# Altium PCB inwall_wifi.PcbDoc
Units mm, origin at the board's own origin, x right, y up, seen from the top; angles counter-clockwise.
Board outline 50 x 50 mm, 2 copper layers (Top Layer, Bottom Layer); 35 components, 23 nets, 342 pads, 21 vias.
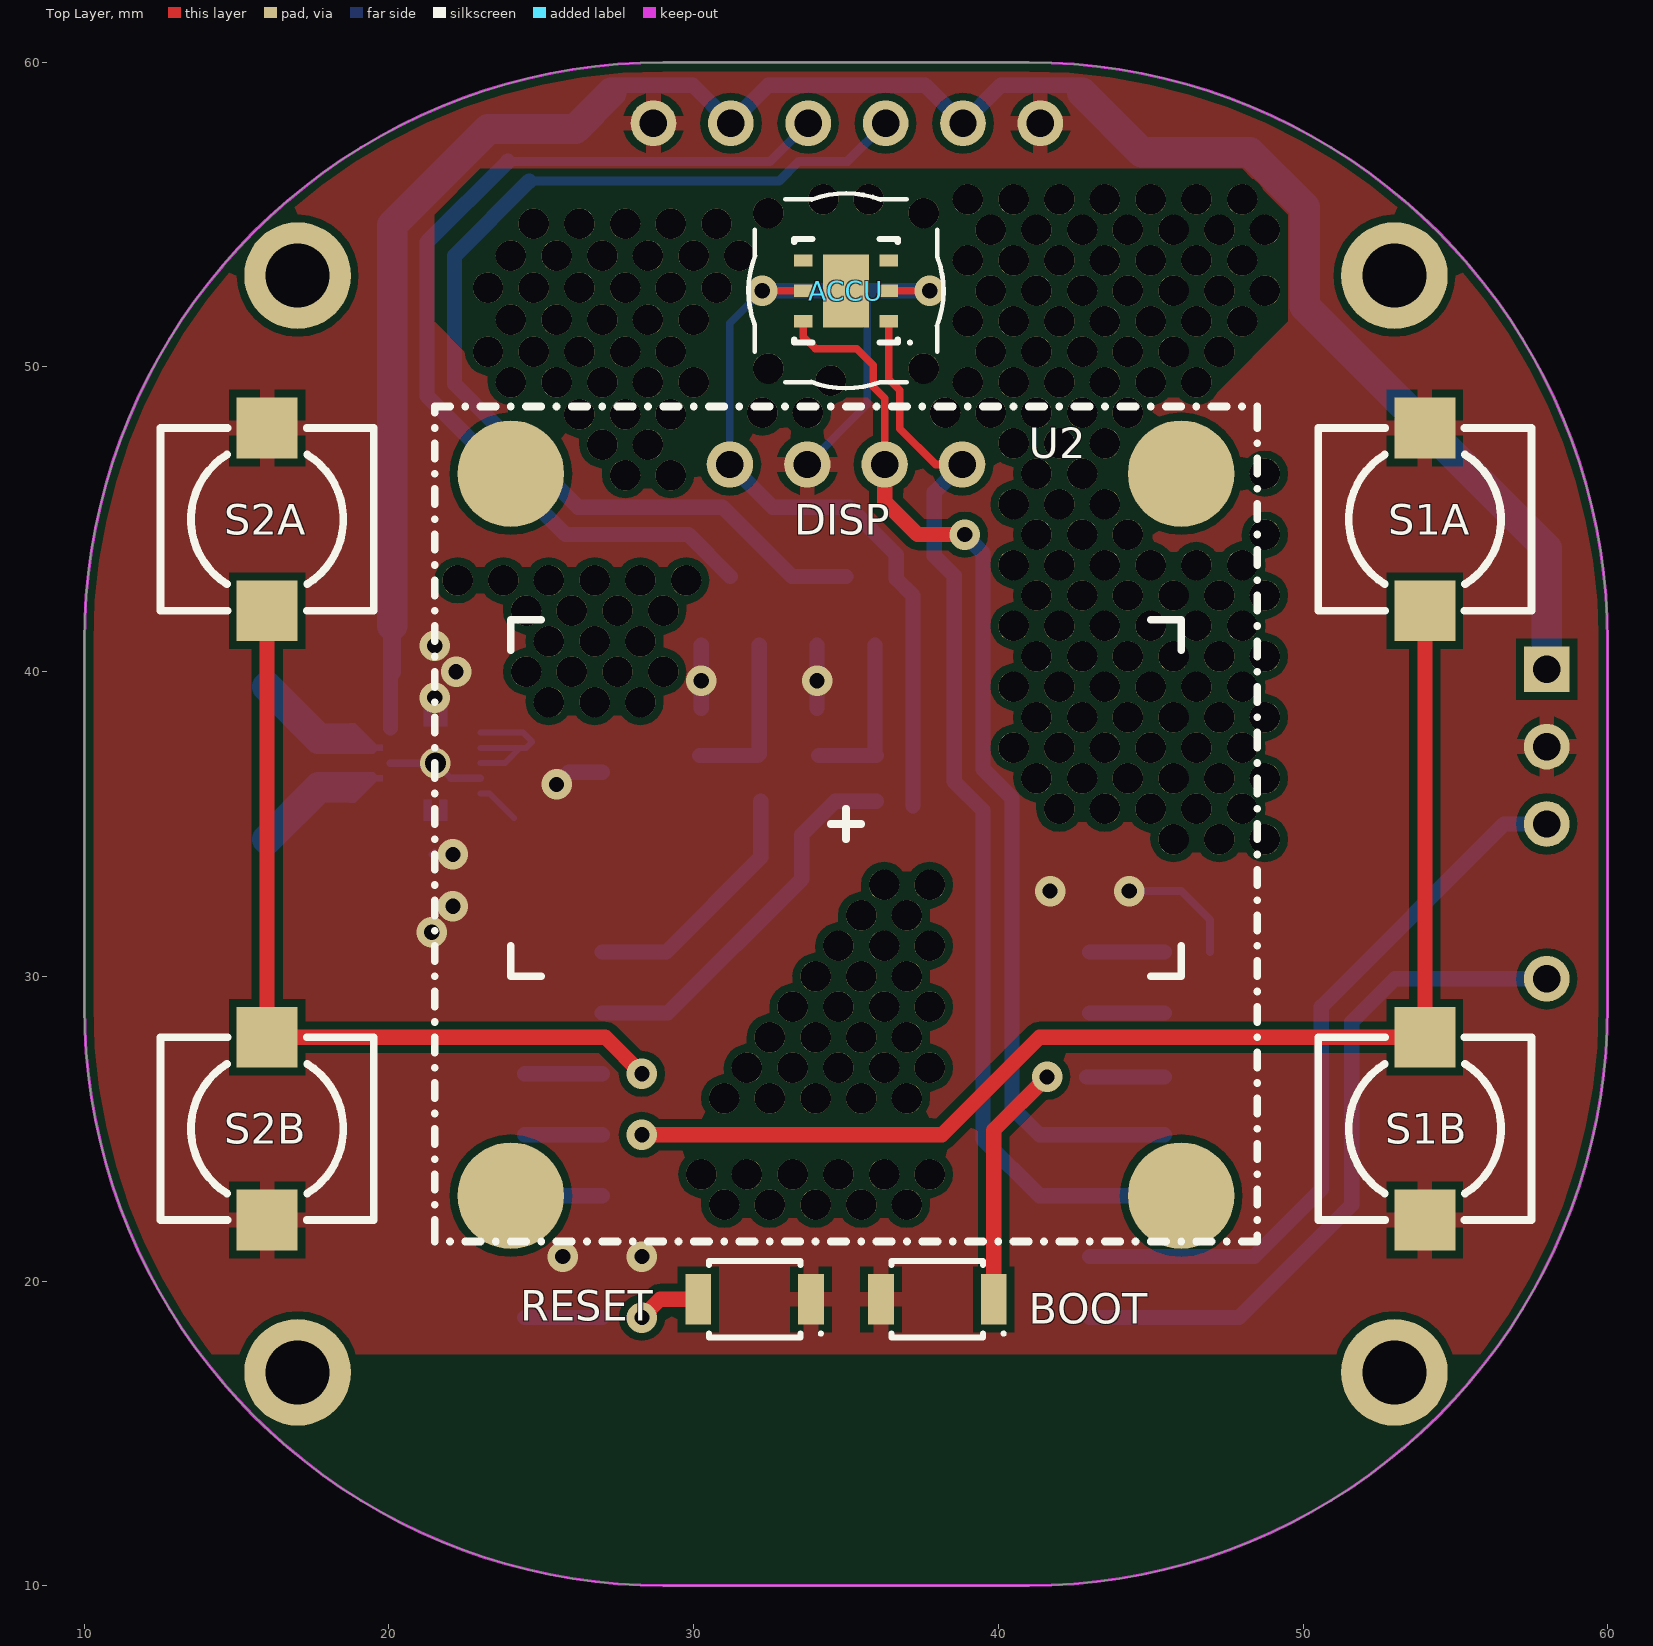
[diagram p0: Top Layer view]
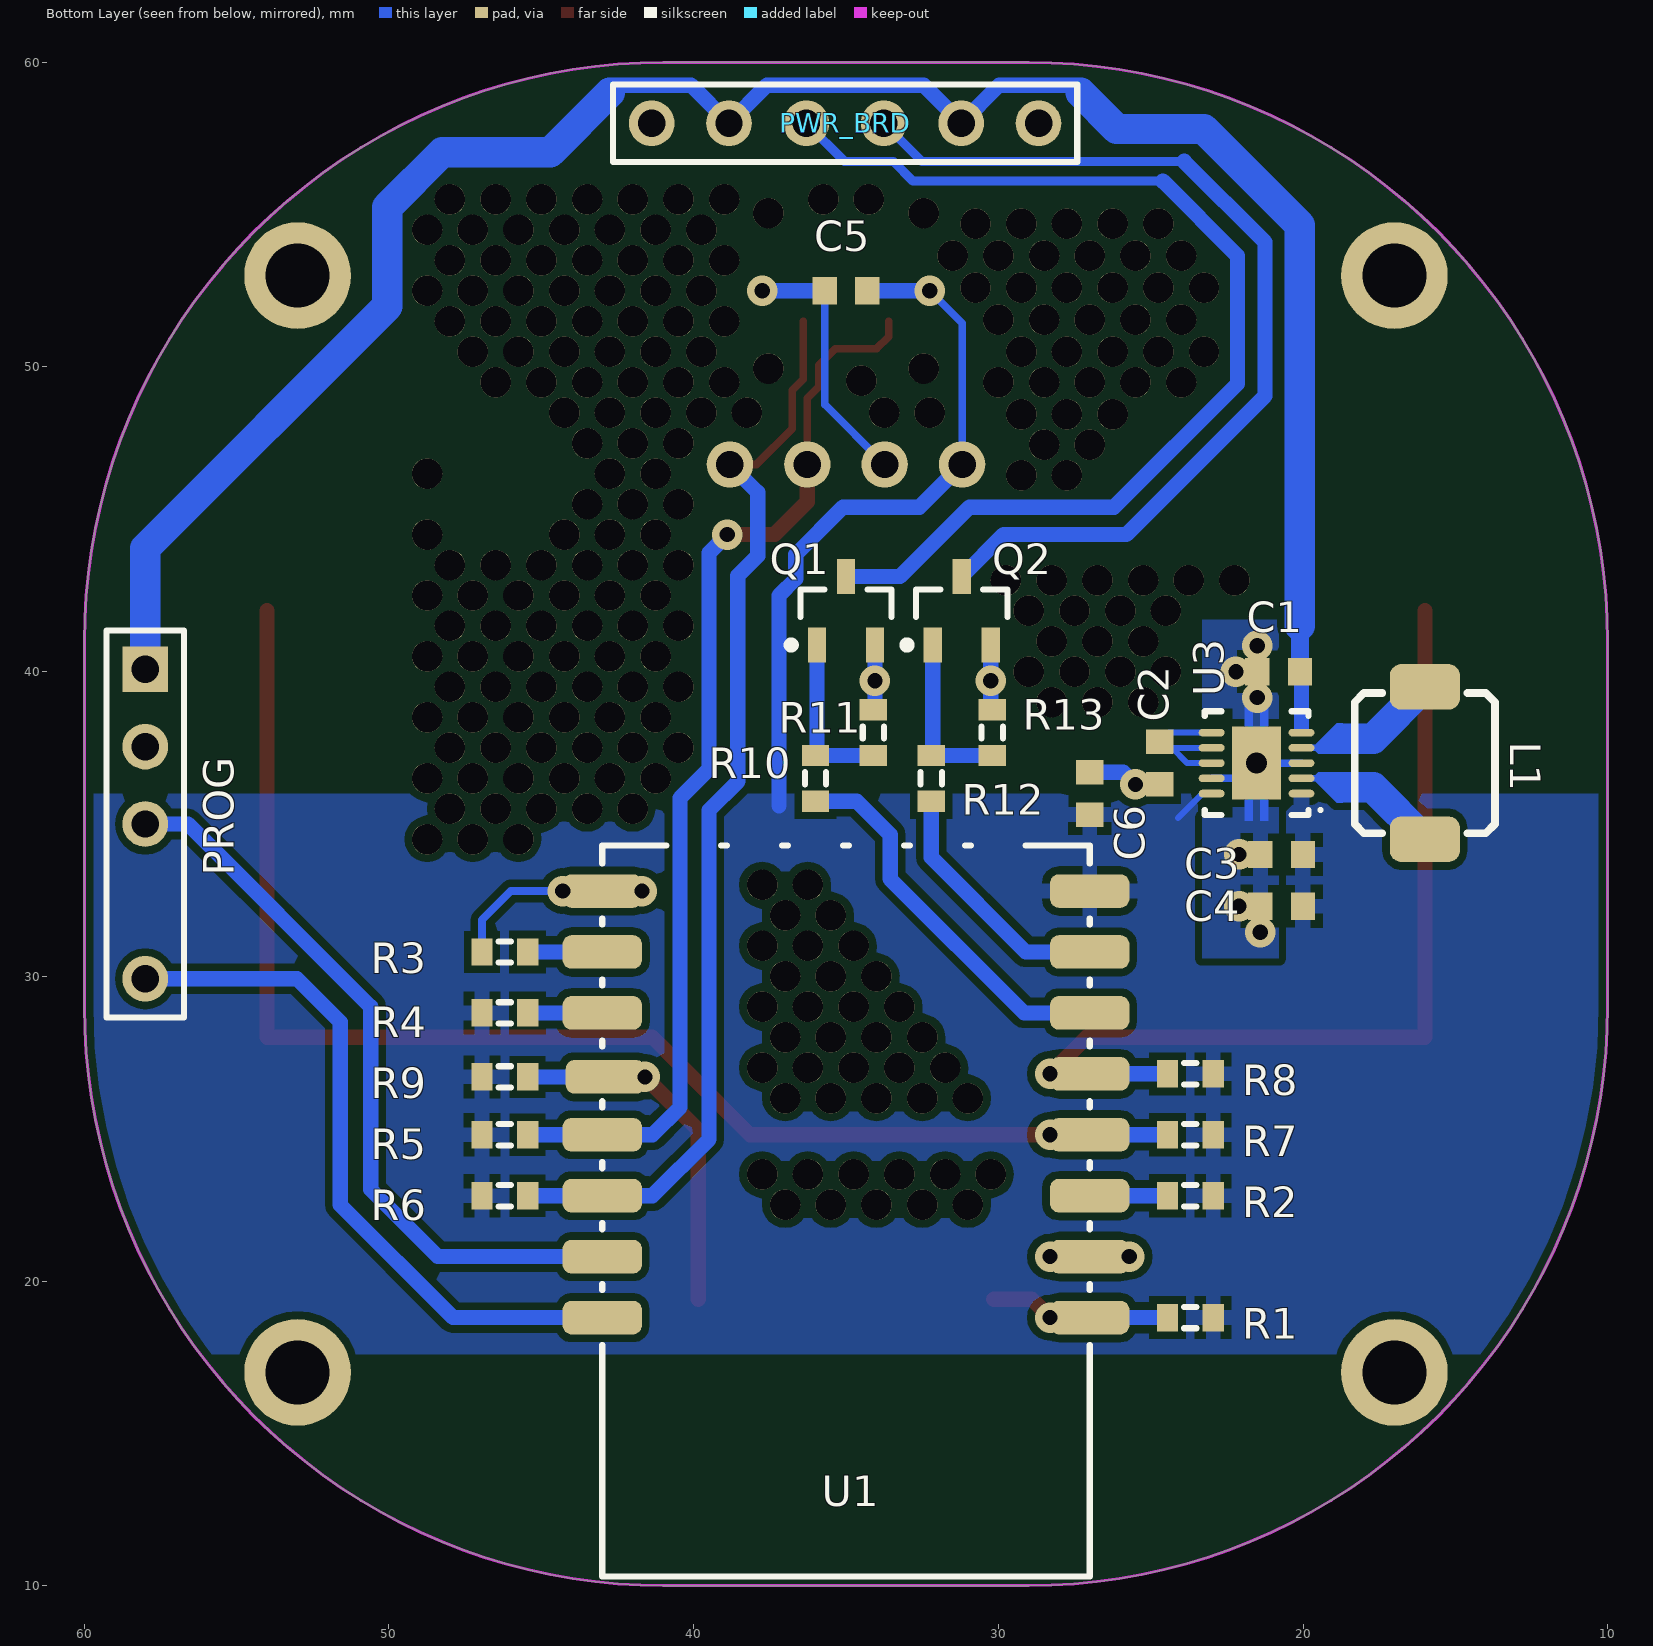
[diagram p1: Bottom Layer view, seen from below]

## Layer stack, top to bottom
Top Solder: solder mask 0.0102, Solder Resist, Dk 3.5
Top Layer: signal copper 0.0356
Dielectric 1: dielectric 0.32, FR-4, Dk 4.8
Bottom Layer: signal copper 0.0356
Bottom Solder: solder mask 0.0102, Solder Resist, Dk 3.5

## Board outline
29,10 cw(c29,29) 10,29 10,41 cw(c29,41) 29,60 41,60 cw(c41,41) 60,41 60,29 cw(c41,29) 41,10

## Design rules (kind name [scope] priority, off if disabled: settings)
Clearance [All] p1: gap=0.25 ignorepadtopadclearanceinfootprint=FALSE except(0: Arc-Hole Track-Hole SMDPad-Hole THPad-Hole Via-Hole Fill-Hole Poly-Hole Region-Hole Text-Hole)
ComponentClearance [All] p1: gap=0.1 collisioncheckmode=3 verticalgap=0.254 showdistances=FALSE
DiffPairsRouting [All] p1: maxlimit=0.5 minlimit=0.125 mostfreqgap=0.25 toplayer_minwidth=0.125 toplayer_maxwidth=1 toplayer_prefwidth=0.25 bottomlayer_minwidth=0.125 bottomlayer_maxwidth=1 bottomlayer_prefwidth=0.25 maxuncoupledlength=12.7
FanoutControl Fanout_BGA [IsBGA] p1: bgadir=Out bgaviamode=Centered fanoutstyle=BGA fanoutdirection=None viagrid=0.025 // Fanout_BGA (Default Rule)
HoleSize [All] p1: absolutevalues=TRUE maxlimit=5 minlimit=0.33 maxpercent=80.000 minpercent=20.000
HoleToHoleClearance [All] p1: gap=0.25 allowstackedmicrovias=TRUE
MatchedLengths [InNetClass('SPIFI')] p1: tolerance=0.2 checknetsindiffpair=TRUE checkdiffpairvsdiffpair=FALSE checkxsignals=FALSE checkothers=FALSE
MinimumAnnularRing [All] p1: minimumring=0.178
MinimumSolderMaskSliver [All] p1: minsoldermaskwidth=0.05
PlaneClearance [All] p1: clearance=0.152
PlaneConnect [All] p1: planeconnectstyle=Direct reliefexpansion=0.508 reliefentries=4 reliefconductorwidth=0.254 reliefairgap=0.254
PolygonConnect [All] p1: thpad.connectstyle=Relief thpad.reliefconductorwidth=0.5 thpad.reliefentries=4 thpad.polygonreliefangle="90 Angle" thpad.airgapwidth=0.25 smdpad.connectstyle=Relief smdpad.reliefconductorwidth=0.5 smdpad.reliefentries=4 smdpad.polygonreliefangle="90 Angle" smdpad.airgapwidth=0.25 via.connectstyle=Direct via.reliefconductorwidth=0.4 via.reliefentries=4 via.polygonreliefangle="90 Angle" via.airgapwidth=0.25
RoomDefinition inwall_wifi [InComponentClass('inwall_wifi')] p1: confinementstyle=ConfineIn formatcopy=TRUE lockcomponents=FALSE outline 61,61 9,61 9,9 61,9
RoutingCorners [All] p1: cornerstyle=45-Degree minsetback=1 maxsetback=1
RoutingVias [All] p1: holewidth=0.35 width=0.7 viastyle="Through Hole" minholewidth=0.33 minwidth=0.686 maxholewidth=0.8 maxwidth=2
SilkToSilkClearance [All] p1: silktosilkclearance=0
SilkToSolderMaskClearance SilkscreenOverComponentPads [IsPad] p1: minsilkscreentomaskgap=0 clearancetoexposedcopper=TRUE
SolderMaskExpansion [All] p1: expansion=0.01
Width [All] p1: maxlimit=5 minlimit=0.152 preferedwidth=0.2
19 further rules are at their usual default settings.

## Components (designator, comment, footprint, x,y, rotation, side; value= is the part's Value field where it differs from the comment)
ACCU "" SF2 35,52.5 r0 top
BOOT "SW-PB" B3U-1000P(M) 38,19.4 r180 top
C1 "Cap Semi" 1608[0603] 20.8,40 r0 bottom value=10uF
C2 "Cap Semi" 1608[0603] 24.7,37 r270 bottom value=100nF
C3 "Cap Semi" 1608[0603] 20.7,34 r180 bottom value=10uF
C4 "Cap Semi" 1608[0603] 20.7,32.3 r180 bottom value=10uF
C5 "Cap Semi" 1608[0603] 35,52.5 r0 bottom value=100nF
C6 "Cap Semi" 1608[0603] 27,36 r90 bottom value=100nF
DISP "0.96'' OLED I2C" OLED_I2C 35,35 r0 top
L1 "HPI0420-2R2" "HPI 0420" 16,37 r270 bottom value=2.2uH
PROG "Header 5" HDR1X5 58,40.08 r270 bottom
PWR_BRD "Header 6" HDR1X6 28.68,58 r0 bottom
Q1 "BC817-25" SOT-23A_N 35,42 r90 bottom
Q2 "BC817-25" SOT-23A_N 31.2,42 r90 bottom
R1 "Res3" J1-0603 23.7,18.8 r180 bottom value=10k
R2 "Res3" J1-0603 23.7,22.8 r180 bottom value=10k
R3 "Res3" J1-0603 46.2,30.8 r180 bottom value=10k
R4 "Res3" J1-0603 46.2,28.8 r0 bottom value=10k
R5 "Res3" J1-0603 46.2,24.8 r0 bottom value=10k
R6 "Res3" J1-0603 46.2,22.8 r0 bottom value=10k
R7 "Res3" J1-0603 23.7,24.8 r180 bottom value=10k
R8 "Res3" J1-0603 23.7,26.8 r180 bottom value=10k
R9 "Res3" J1-0603 46.2,26.7 r0 bottom value=10k
R10 "Res3" J1-0603 36,36.5 r90 bottom value=330
R11 "Res3" J1-0603 34.1,38 r270 bottom value=10k
R12 "Res3" J1-0603 32.2,36.5 r270 bottom value=330
R13 "Res3" J1-0603 30.2,38 r90 bottom value=10k
RESET "SW-PB" B3U-1000P(M) 32,19.4 r180 top
S1A "SW-PB" B3AL 54,45 r90 top
S1B "SW-PB" B3AL 54,25 r270 top
S2A "SW-PB" B3AL 16,45 r90 top
S2B "SW-PB" B3AL 16,25 r270 top
U1 "ESP12E" ESP12E 27,18.8 r0 bottom
U2 "SHT21" SON100P300X120_HS-7N 35,52.5 r180 top
U3 "TPS63031DRCR" DRC10-2400X1650TP 21.525,37 r0 bottom

## Footprints (in the part's own frame and the unit in brackets; to place one, negate y for a bottom-side part, rotate by r counter-clockwise, add the part's x,y. Pads: shape width x height; smd on the part's side, far side on the other; paste and mask are expansions set on the pad)
1608[0603] [mm] "Chip Capacitor, Body 1.6x0.8mm, IPC High Density"
  rect 0.8x0.9 smd: 1(-0.7,0) 2(0.7,0)
  body extent -0.87,-0.48 0.87,0.48, height 1.3
B3AL [mm] "B3AL button"
  rect 2x2 smd: 1(-3,0) 2(3,0)
  silkscreen extent -3,-3.5 3,3.5, body extent -3.13,-3.13 3.13,3.13, height 5
B3U-1000P(M) [mm] "SMD microswitch"
  rect 0.85x1.65 smd: 1(-1.85,0) 2(1.85,0)
  silkscreen extent -2.22,-1.25 1.5,1.25, body extent -1.5,-1.25 1.5,1.25, height 1.75
DRC10-2400X1650TP [mm] "SON, 10-Leads, Body 3x3mm, Pitch 0.5mm, Thermal Pad 2.4x1.65mm, TI Recommended"
  oval 0.85x0.25 smd paste-0.025 mask+0.07: 1(-1.475,1) 2(-1.475,0.5) 3(-1.475,0) 4(-1.475,-0.5) 5(-1.475,-1) 6(1.475,-1) 7(1.475,-0.5) 8(1.475,0) 9(1.475,0.5) 10(1.475,1)
  rect 1.6x2.4 smd paste-0.825 mask+0.07: 11(0,0)
  Top Layer region: -0.39,1.9 -0.11,1.9 -0.11,1.2 -0.39,1.2
  Top Layer region: 0.39,1.2 0.11,1.2 0.11,1.9 0.39,1.9
  Top Layer region: 0.39,-1.9 0.11,-1.9 0.11,-1.2 0.39,-1.2
  Top Layer region: -0.39,-1.2 -0.11,-1.2 -0.11,-1.9 -0.39,-1.9
  silkscreen extent -2.15,-1.7 1.7,1.7, body extent -1.55,-1.55 1.55,1.55, height 1
ESP12E [mm] "ESP12E"
  rrect50% 2.6x1.1 smd: 1(0,0) 2(0,-2) 3(0,-4) 4(0,-6) 5(0,-8) 6(0,-10) 7(0,-12) 8(0,-14) 15(16,-14) 16(16,-12) 17(16,-10) 18(15.9,-7.9) 19(16,-6) 20(16,-4) 21(16,-2) 22(16,0)
  silkscreen extent 0,-15.5 16,8.5, body extent -0.13,-15.63 16.13,8.63, height 3.5
HDR1X5 [mm] "Connector; Header; 5 Position"
  rect 1.5x1.5 hole 0.9: 1(0,0)
  round 1.5 hole 0.9: 2(2.54,0) 3(5.08,0) 5(10.16,0)
  silkscreen extent -1.27,-1.27 11.43,1.27
HDR1X6 [mm] "Connector; Header; 6 Position"
  round 1.5 hole 0.9: 1(0,0) 2(2.54,0) 3(5.08,0) 4(7.62,0) 5(10.16,0) 6(12.7,0)
  silkscreen extent -1.27,-1.27 13.97,1.27
"HPI 0420" [mm] "SMD mounted power inductor"
  rrect50% 1.5x2.3 smd: 1(-2.5,0) 2(2.5,0)
  silkscreen extent -2.3,-2.3 2.3,2.3, body extent -2.43,-2.43 2.43,2.43, height 2
J1-0603 [mm] "Chip Resistor, Body 1.6x0.8mm, IPC High Density"
  rect 0.7x0.9 smd: 1(-0.75,0) 2(0.75,0)
  silkscreen extent -0.2,-0.35 0.2,0.35, body extent -0.85,-0.48 0.85,0.48, height 0.9
OLED_I2C [mm] "0.96'' OLED I2C"
  round 1.524 hole 0.9: 1(-3.81,11.8) 2(-1.27,11.8) 3(1.27,11.8) 4(3.81,11.8)
  round 3.5 smd: MH(-11,-12.2) MH(-11,11.5) MH(11,-12.2) MH(11,11.5)
  silkscreen extent -13.5,-13.7 13.5,13.7, body extent -13.5,-13.7 13.5,13.7, height 2.55
SF2 [mm] "SHT21 filter cap"
  round 1 hole 1 unplated: MH(-2.55,-2.55) MH(-2.55,2.55) MH(2.55,-2.55) MH(2.55,2.55)
  silkscreen extent -3.2,-3.2 3.2,3.2, body extent -3.2,-3.2 3.2,3.2, height 1.9
SON100P300X120_HS-7N [mm] "SON, 6-Leads, Body 3,00x3,00mm, Pitch 1,00mm, Thermal Pad 2,40x1,50mm, IPC Medium Density"
  rect 0.6x0.4 smd: 1(-1.4,1) 2(-1.4,0) 3(-1.4,-1) 4(1.4,-1) 5(1.4,0) 6(1.4,1)
  rect 1.5x2.4 smd: 7(0,0)
  silkscreen extent -2.15,-1.7 1.7,1.75, body extent -1.55,-1.55 1.55,1.55, height 1.2
SOT-23A_N [mm] "SOT23, 3-Leads, Body 2.9x1.3mm, Pitch 0.95mm, Lead Span 2.3mm, IPC Medium Density"
  rect 1.15x0.6 smd: 1(-1.125,0.95) 2(-1.125,-0.95) 3(1.125,0)
  silkscreen extent -1.25,-1.5 0.7,1.93, body extent -0.7,-1.5 0.7,1.5, height 1.09

## Part data
BOOT RESET: "Switch", Supplier Part Number 1=2500851, LatestRevisionDate=17-Jul-2002, LatestRevisionNote="Re-released for DXP Platform.", PackageDescription="Switch; 2 Leads", PackageReference=SPST-2, Published=24-Mar-1999, Publisher="Altium Limited", Supplier 1=Farnell, Supplier 2=Farnell, Supplier Part Number 2=1333652
C1 C2 C3 C4 C5 C6: "Capacitor (Semiconductor SIM Model)", LatestRevisionDate=29-May-2009, LatestRevisionNote="IPC-7351 Footprint Added.", PackageDescription="Chip Capacitor", PackageReference=C1206, Published=8-Jun-2000, Publisher="Altium Limited"
DISP: library part OLED_I2C, Supplier Part Number 1=REX012864MXPP3N0, Supplier 1=TME
L1: library part "Inductor Iron", "Magnetic-Core Inductor", LatestRevisionDate=17-Jul-2002, LatestRevisionNote="Re-released for DXP Platform.", PackageDescription="Axial Device, Thru-Hole; 2 Leads; 0.9 in Pin Spacing", PackageReference=AXIAL-0.9, Published=24-Mar-1999, Publisher="Altium Limited", Supplier 1=TME, Supplier Part Number 1=HPI0420-2R2
PROG: "Header, 5-Pin", LatestRevisionDate=17-Jul-2002, LatestRevisionNote="Re-released for DXP Platform.", Publisher="Altium Limited"
PWR_BRD: "Header, 6-Pin", LatestRevisionDate=17-Jul-2002, LatestRevisionNote="Re-released for DXP Platform.", Publisher="Altium Limited"
Q1 Q2: "NPN General Purpose Amplifier", ComponentLink1Description="Manufacturer Link", ComponentLink1URL=http://www.fairchildsemi.com/, ComponentLink2Description="Discontinuation Notice", ComponentLink2URL=http://www.fairchildsemi.com/obsolete/obs.jsp, DatasheetVersion=1997, LatestRevisionDate=20-Nov-2009, LatestRevisionNote="IPC-7351 Footprint Added.", PackageDescription="3-Pin SOT-23 Package 0.95 mm Pitch, 2.3 mm Lead Span", PackageReference=SOT-23A, PackageVersion=Sep-1998, Published=8-Jun-2000, Publisher="Altium Limited"
R1 R2 R3 R4 R5 R6 R7 R8 R9 R10 R11 R12 R13: "Resistor", LatestRevisionDate=29-May-2009, LatestRevisionNote="IPC-7351 Footprint Added.", PackageDescription="Chip Resistor", PackageReference=J1-0603, Published=8-Jun-2000, Publisher="Altium Limited"
S1A S1B S2A S2B: "Switch", Supplier Part Number 1=1908276RL, LatestRevisionDate=17-Jul-2002, LatestRevisionNote="Re-released for DXP Platform.", PackageDescription="Switch; 2 Leads", PackageReference=SPST-2, Published=24-Mar-1999, Publisher="Altium Limited", Supplier 1=Farnell, Supplier 2=Farnell, Supplier 3=Farnell, Supplier 4=Farnell, Supplier Part Number 2=1908275, Supplier Part Number 3=1908272, Supplier Part Number 4=1908274
U2: "SHT21 H/T sensor"
U3: library part TPS63001DRCR, "Buck-Boost Voltage Converter with 1.8 to 5.5 V Input and 3.3 V Output, -40 to 85 degC, 10-Pin SON (DRC), Green (RoHS & no Sb/Br)", Dynamic Voltage Scaling=TRUE, Manufacturer="Texas Instruments", Supplier Part Number 1=296-19643-2-ND, Switching Frequency(Max)(kHz)=1500, ComponentLink1Description=Datasheet, ComponentLink1URL=http://www.ti.com/general/docs/lit/getliterature.tsp?genericPartNumber=TPS63001&fileType=pdf, ComponentLink2Description="Package Specification", ComponentLink2URL=http://www.ti.com/litv/pdf/mpds117k, DatasheetVersion=SLVS520B, Eco-Plan="Green (RoHS & no Sb/Br)", Iout(Max)(A)=1.2, Iq(Typ)(mA)=0.03, Mounting Technology="Surface Mount", PackageDescription="10-Pin Plastic Small Outline No-Lead, 3 x 3 x 1 mm Body, 0.5 mm Pitch, Exposed Pad", PackageReference=DRC10-2400X1650TP, PackageVersion="revL, Sep-2011", PartNumber=TPS63001DRCR, Preset Vout(V)=3.3, Regulated Outputs(#)=1, SubFamily="Buck-Boost Regulator", Supplier 1=Digi-Key, Supplier 2=Digi-Key, Supplier 3=Digi-Key, Supplier 4=Farnell, Supplier 5=Newark, Supplier 6=Mouser, Supplier 7=TME, Supplier Part Number 2=296-19643-1-ND, Supplier Part Number 3=296-19643-6-ND, Supplier Part Number 4=1412595, Supplier Part Number 5=85K1711, Supplier Part Number 6=595-TPS63001DRCR, Supplier Part Number 7=TPS63031DSKT, Synchronous Rectification=TRUE, Topology=Buck-Boost, Vin(Max)(V)=5.5, Vin(Min)(V)=1.8, Vout(Max)(V)=3.3, Vout(Min)(V)=3.3

## Free pads (board coordinates)
  round 3.5 hole 2.1 unplated: MH(17,17) MH(17,53) MH(53,17) MH(53,53)
  round 1 hole 1 unplated: TH(22.25,43) TH(23.25,50.5) TH(23.25,52.6) TH(23.75,43) TH(24,51.55) TH(24,53.65) TH(24,49.5) TH(24.5,40) TH(24.5,42) TH(24.75,50.5) TH(24.75,52.6) TH(24.75,54.7) TH(25.25,39) TH(25.25,41) TH(25.25,43) TH(25.5,51.55) TH(25.5,53.65) TH(25.5,49.5) TH(26,40) TH(26,42) TH(26.25,50.5) TH(26.25,52.6) TH(26.25,54.7) TH(26.25,48.45) TH(26.75,41) TH(26.75,39) TH(26.75,43) TH(27,51.55) TH(27,53.65) TH(27,49.5) TH(27,47.45) TH(27.5,40) TH(27.5,42) TH(27.75,50.5) TH(27.75,52.6) TH(27.75,54.7) TH(27.75,48.45) TH(27.75,46.45) TH(28.25,41) TH(28.25,39) TH(28.25,43) TH(28.5,51.55) TH(28.5,53.65) TH(28.5,49.5) TH(28.5,47.45) TH(29,40) TH(29,42) TH(29.25,50.5) TH(29.25,52.6) TH(29.25,54.7) TH(29.25,48.45) TH(29.25,46.45) TH(29.75,43) TH(30,51.55) TH(30,53.65) TH(30,49.5) TH(30.25,23.5) TH(30.75,52.6) TH(30.75,54.7) TH(31,22.5) TH(31,26) TH(31.5,53.65) TH(31.75,23.5) TH(31.75,27) TH(32.25,48.5) TH(32.5,22.5) TH(32.5,26) TH(32.5,28) TH(33.25,23.5) TH(33.25,27) TH(33.25,29) TH(33.75,48.5) TH(34,22.5) TH(34,26) TH(34,28) TH(34,30) TH(34.25,55.5) TH(34.5,49.55) TH(34.75,23.5) TH(34.75,27) TH(34.75,29) TH(34.75,31) TH(35.5,22.5) TH(35.5,26) TH(35.5,28) TH(35.5,30) TH(35.5,32) TH(35.75,55.5) TH(36.25,23.5) TH(36.25,27) TH(36.25,29) TH(36.25,33) TH(36.25,31) TH(37,22.5) TH(37,26) TH(37,28) TH(37,30) TH(37,32) TH(37.75,23.5) TH(37.75,27) TH(37.75,29) TH(37.75,31) TH(37.75,33) TH(38.25,48.5) TH(39,53.5) TH(39,51.5) TH(39,49.5) TH(39,55.5) TH(39.75,54.5) TH(39.75,52.5) TH(39.75,50.5) TH(39.75,48.5) TH(40.5,53.5) TH(40.5,51.5) TH(40.5,49.5) TH(40.5,47.5) TH(40.5,45.5) TH(40.5,43.5) TH(40.5,41.5) TH(40.5,37.5) TH(40.5,39.5) TH(40.5,55.5) TH(41.25,54.5) TH(41.25,52.5) TH(41.25,50.5) TH(41.25,48.5) TH(41.25,46.5) TH(41.25,44.5) TH(41.25,42.5) TH(41.25,36.5) TH(41.25,38.5) TH(41.25,40.5) TH(42,55.5) TH(42,53.5) TH(42,51.5) TH(42,49.5) TH(42,47.5) TH(42,45.5) TH(42,43.5) TH(42,35.5) TH(42,41.5) TH(42,37.5) TH(42,39.5) TH(42.75,54.5) TH(42.75,52.5) TH(42.75,50.5) TH(42.75,48.5) TH(42.75,46.5) TH(42.75,44.5) TH(42.75,42.5) TH(42.75,36.5) TH(42.75,38.5) TH(42.75,40.5) TH(43.5,55.5) TH(43.5,53.5) TH(43.5,51.5) TH(43.5,49.5) TH(43.5,47.5) TH(43.5,45.5) TH(43.5,43.5) TH(43.5,35.5) TH(43.5,41.5) TH(43.5,37.5) TH(43.5,39.5) TH(44.25,54.5) TH(44.25,52.5) TH(44.25,50.5) TH(44.25,48.5) TH(44.25,44.5) TH(44.25,42.5) TH(44.25,36.5) TH(44.25,38.5) TH(44.25,40.5) TH(45,55.5) TH(45,51.5) TH(45,53.5) TH(45,49.5) TH(45,43.5) TH(45,35.5) TH(45,41.5) TH(45,37.5) TH(45,39.5) TH(45.75,54.5) TH(45.75,52.5) TH(45.75,50.5) TH(45.75,34.5) TH(45.75,42.5) TH(45.75,36.5) TH(45.75,38.5) TH(45.75,40.5) TH(46.5,55.5) TH(46.5,53.5) TH(46.5,51.5) TH(46.5,49.5) TH(46.5,35.5) TH(46.5,43.5) TH(46.5,41.5) TH(46.5,37.5) TH(46.5,39.5) TH(47.25,54.5) TH(47.25,52.5) TH(47.25,50.5) TH(47.25,34.5) TH(47.25,42.5) TH(47.25,36.5) TH(47.25,38.5) TH(47.25,40.5) TH(48,55.5) TH(48,53.5) TH(48,51.5) TH(48,43.5) TH(48,35.5) TH(48,41.5) TH(48,37.5) TH(48,39.5) TH(48.75,54.5) TH(48.75,52.5) TH(48.75,46.5) TH(48.75,34.5) TH(48.75,44.5) TH(48.75,42.5) TH(48.75,36.5) TH(48.75,38.5) TH(48.75,40.5)

## Via types
v1: diameter 1, hole 0.5, Top Layer to Bottom Layer, tented both sides, 18 vias
v2: diameter 1, hole 0.5, Top Layer to Bottom Layer, 2 vias
v3: diameter 1, hole 0.7, Top Layer to Bottom Layer, 1 vias

## Nets (pads, with @x,y where several pads share a name; then routed paths per layer and width w, separated by ;. In a path a pad name is that pad's centre, name@x,y a point inside that pad or via, vN(x,y) a via of type N, cw(c..) or ccw(c..) an arc to the next point about the centre after c; other vN are vias at no path point)
BUTTON1: R7.1 S1A.1 S1B.1 U1.4 | length 43.6
  Top Layer w0.5: v1(28.3,24.8) 38.15,24.8 41.35,28 S1B.1 S1A.1
  Bottom Layer w0.5: R7.1 U1.4
BUTTON2: R8.1 S2A.1 S2B.1 U1.5 | length 29.3
  Top Layer w0.5: S2A.1 S2B.1 27.1,28 v1(28.3,26.8)
  Bottom Layer w0.5: R8.1 U1.5
FLASH: BOOT.1 R9.1 U1.18 | length 10.6
  Top Layer w0.5: BOOT.1 39.85,24.95 v1(41.6,26.7)
  Bottom Layer w0.5: U1.18 R9.1
GND: BOOT.2 C1.2 C2.2 C3.1 C4.1 C5.2 C6.2 DISP.2 PROG.2 PWR_BRD.1 PWR_BRD.6 Q1.2 Q2.2 R3.1 R11.1 R13.2 RESET.1 S1A.2 S1B.2 S2A.2 S2B.2 U1.2 U1.15 U2.2 U3.3 U3.9 U3.11 | length 23.3
  Top Layer w0.25: U2.2 v2(37.75,52.5)
  Bottom Layer w0.2: C3.1 C3.1@21.5,34.1 ; v3(21.525,37) U3.11@22.025,36.5 ; R13.2 R13.2@30.25,38.8 ; R11.1@34.05,38.8 R11.1
  Bottom Layer w0.25: U3.3 v3(21.525,37) ; U3.11@22.025,36.5 U3.9 ; DISP.2 35.7,48.77 C5.2
  Bottom Layer w0.254: v1(44.3,32.8) 46,32.8 46.95,31.85 R3.1
  Bottom Layer w0.5: v1(25.5,36.3) 25.9,36.7 C6.2 ; R13.2@30.25,38.8 v1(30.25,39.7) Q2.2 ; R11.1@34.05,38.8 v1(34.05,39.7) Q1.2 ; C5.2 v2(37.75,52.5)
  other v1: 25.7,20.8 28.3,20.8 21.4,31.45 22.1,32.3 41.7,32.8 22.1,34 21.5,39.15 22.2,40 21.5,40.85
LOAD1: R10.1 U1.6 | length 12.7
  Bottom Layer w0.5: U1.6 29.15,28.8 33.55,33.2 33.55,34.65 34.65,35.75 R10.1
LOAD2: R12.2 U1.7 | length 8.3
  Bottom Layer w0.5: U1.7 29.1,30.8 32.2,33.9 R12.2
NetC2_1: C2.1 U3.6 U3.7 U3.8 | length 5.1
  Bottom Layer w0.2: U3.8 23.8,37 C2.1@24.3,37.5 ; U3.7 C2.1@24.3,37.5 ; U3.6 24.4,38 C2.1 24.5,37.5 C2.1@24.3,37.5
NetL1_1: L1.1 U3.4 | length 3.4
  Bottom Layer w1: L1.1 17.7,37.8 18.7,37.8
NetL1_2: L1.2 U3.2 | length 3.4
  Bottom Layer w1: L1.2 17.7,36.2 18.7,36.2
NetQ1_1: Q1.1 R10.2 R11.2 | length 5.5
  Bottom Layer w0.2: R10.2@35.95,37.3 R10.2
  Bottom Layer w0.5: R11.2 R10.2 ; R10.2@35.95,37.3 Q1.1
NetQ2_1: Q2.1 R12.1 R13.1 | length 5.5
  Bottom Layer w0.2: R12.1@32.1,37.25 R12.1@32.15,37.3
  Bottom Layer w0.5: R13.1 R12.1@32.1,37.25 ; R12.1@32.15,37.3 Q2.1
NetR1_1: R1.1 RESET.2 U1.1 | length 4.6
  Top Layer w0.5: v1(28.3,18.8) 28.9,19.4 RESET.2
  Bottom Layer w0.5: R1.1 U1.1
NetR2_1: R2.1 U1.3 | length 2.5
  Bottom Layer w0.5: R2.1 U1.3
NetR3_2: R3.2 U1.16 | length 2.4
  Bottom Layer w0.5: U1.16 R3.2
NetR4_1: R4.1 U1.17 | length 2.5
  Bottom Layer w0.5: U1.17 R4.1
OC1: PWR_BRD.4 Q1.3 | length 35.6
  Bottom Layer w0.3: 24.6,56.1 32.8,56.1 33.45,56.75 35.05,56.75 PWR_BRD.4
  Bottom Layer w0.5: 24.6,56.1 22.15,53.65 22.15,49.45 26.2,45.4 30.95,45.4 33.225,43.125 Q1.3
OC2: PWR_BRD.3 Q2.3 | length 31.6
  Bottom Layer w0.3: 23.9,56.75 32.51,56.75 PWR_BRD.3
  Bottom Layer w0.5: 23.9,56.75 21.25,54.1 21.25,49.05 25.8,44.5 29.825,44.5 Q2.3
RX: PROG.3 U1.21 | length 24.4
  Bottom Layer w0.5: U1.21 48.4,20.8 50.6,23 50.6,29 56.6,35 PROG.3
SCL: DISP.3 R5.1 U1.19 U2.6 | length 35.9
  Top Layer w0.25: U2.6 33.6,51 34,50.6 35.35,50.6 35.9,50.05 35.9,49.35 36.27,48.98 DISP.3@36.27,46.94
  Top Layer w0.5: DISP.3 36.27,45.58 37.35,44.5 v1(38.9,44.5)
  Bottom Layer w0.25: DISP.3 36.27,46.87 36.34,46.87 DISP.3@36.27,46.94
  Bottom Layer w0.5: v1(38.9,44.5) 39.5,43.9 39.5,36.8 40.45,35.85 40.45,25.7 41.35,24.8 U1.19 ; U1.19@42.9,24.8 R5.1
SDA: DISP.4 R6.1 U1.20 U2.1 | length 36.2
  Top Layer w0.25: U2.1 36.4,49.6 36.77,49.23 36.77,47.98 37.95,46.8 DISP.4
  Bottom Layer w0.5: DISP.4 37.9,45.89 37.9,43.8 38.55,43.15 38.55,36.4 39.5,35.45 39.5,24.65 41.35,22.8 U1.20 ; U1.20@42.9,22.8 R6.1
TX: PROG.5 U1.22 | length 23.1
  Bottom Layer w0.5: U1.22 47.9,18.8 51.6,22.5 51.6,28.5 53.02,29.92 PROG.5
VCC_3.3V: C3.2 C4.2 C5.1 C6.1 DISP.1 R1.2 R2.2 R4.2 R5.2 R6.2 R7.2 R8.2 R9.2 U1.8 U2.5 U3.1 U3.10 | length 26.1
  Top Layer w0.25: v2(32.25,52.5) U2.5
  Bottom Layer w0.2: U3.10 23.3,36 24.1,35.2
  Bottom Layer w0.25: DISP.1 31.19,51.44 v2(32.25,52.5)
  Bottom Layer w0.5: DISP.1 32.59,45.4 35.1,45.4 36.65,43.85 36.65,43.05 37.2,42.5 37.2,35.6 ; v2(32.25,52.5) C5.1
VCC_5.0V: C1.1 PROG.1 PWR_BRD.2 PWR_BRD.5 U3.5 | length 70.4
  Bottom Layer w0.2: C1.1@20.05,39.95 C1.1
  Bottom Layer w0.5: 20.05,38.15 C1.1@20.05,39.95 ; 27.3,59.25 29.97,59.25 PWR_BRD.2@31.21,58.01 ; 42.75,59.25 40.09,59.25 PWR_BRD.5 37.59,59.25 32.45,59.25 PWR_BRD.2@31.21,58.01 ; PWR_BRD.2@31.21,58.01 PWR_BRD.2 31.2,58 PWR_BRD.2@31.21,58.01
  Bottom Layer w0.6: C1.1 20.1,41.5
  Bottom Layer w1: 20.1,41.5 20.1,54.65 23.261,57.811 26.111,57.811 27.3,59 ; 42.75,59 44.7,57.05 48.25,57.05 50.05,55.25 50.05,52 58,44.05 PROG.1
pads on no net: ACCU.MH DISP.MH U2.3 U2.4 U2.7

## Polygon pours and split planes (outlines as drawn)
GND on Bottom Layer "gndplane3" (solid, remove dead copper, pour order 8): 20.8,35.9 20.8,30.6 23.3,30.6 23.3,35.2 22.3,35.2 22.3,35.9
GND on Bottom Layer "gndplane2" (solid, remove dead copper, pour order 6): 20.8,38.1 20.8,41.7 23.3,41.7 23.3,38.8 22.3,38.8 22.3,38.1
VCC_3.3V on Bottom Layer "pwrplane" (solid, remove dead copper, pour order 10): 10,17.6 10,36 60,36 60,33 60,17.6
GND on Top Layer "gndplane" (solid, remove dead copper, pour order 4): 10,17.6 10,60 60,60 60,33 60,17.6

## Keep-outs
Keep-Out Layer:
  the board outline again, w0.1

## Other copper
Top Layer:
  pour cut-out: 24,49 21.5,51.5 21.5,55 23,56.5 48,56.5 49.5,55 49.5,51.5 47,49
Bottom Layer:
  region net NetL1_2: 19.8,36.6 19.6,36.6 19.5,36.7 18.7,36.7 18.7,35.7 18.9,35.7 19.6,36.4 19.8,36.4
  region net NetL1_1: 19.8,37.4 19.6,37.4 19.5,37.3 18.7,37.3 18.7,38.3 18.9,38.3 19.6,37.6 19.8,37.6